# Altium PCB DRF1609H-PCB-PCB50.PcbDoc
Units mm, origin at the board's own origin, x right, y up, seen from the top; angles counter-clockwise.
Board outline 152.4 x 101.6 mm, 2 copper layers (Top Layer, Bottom Layer); 2 components, 0 nets, 18 pads, 0 vias.
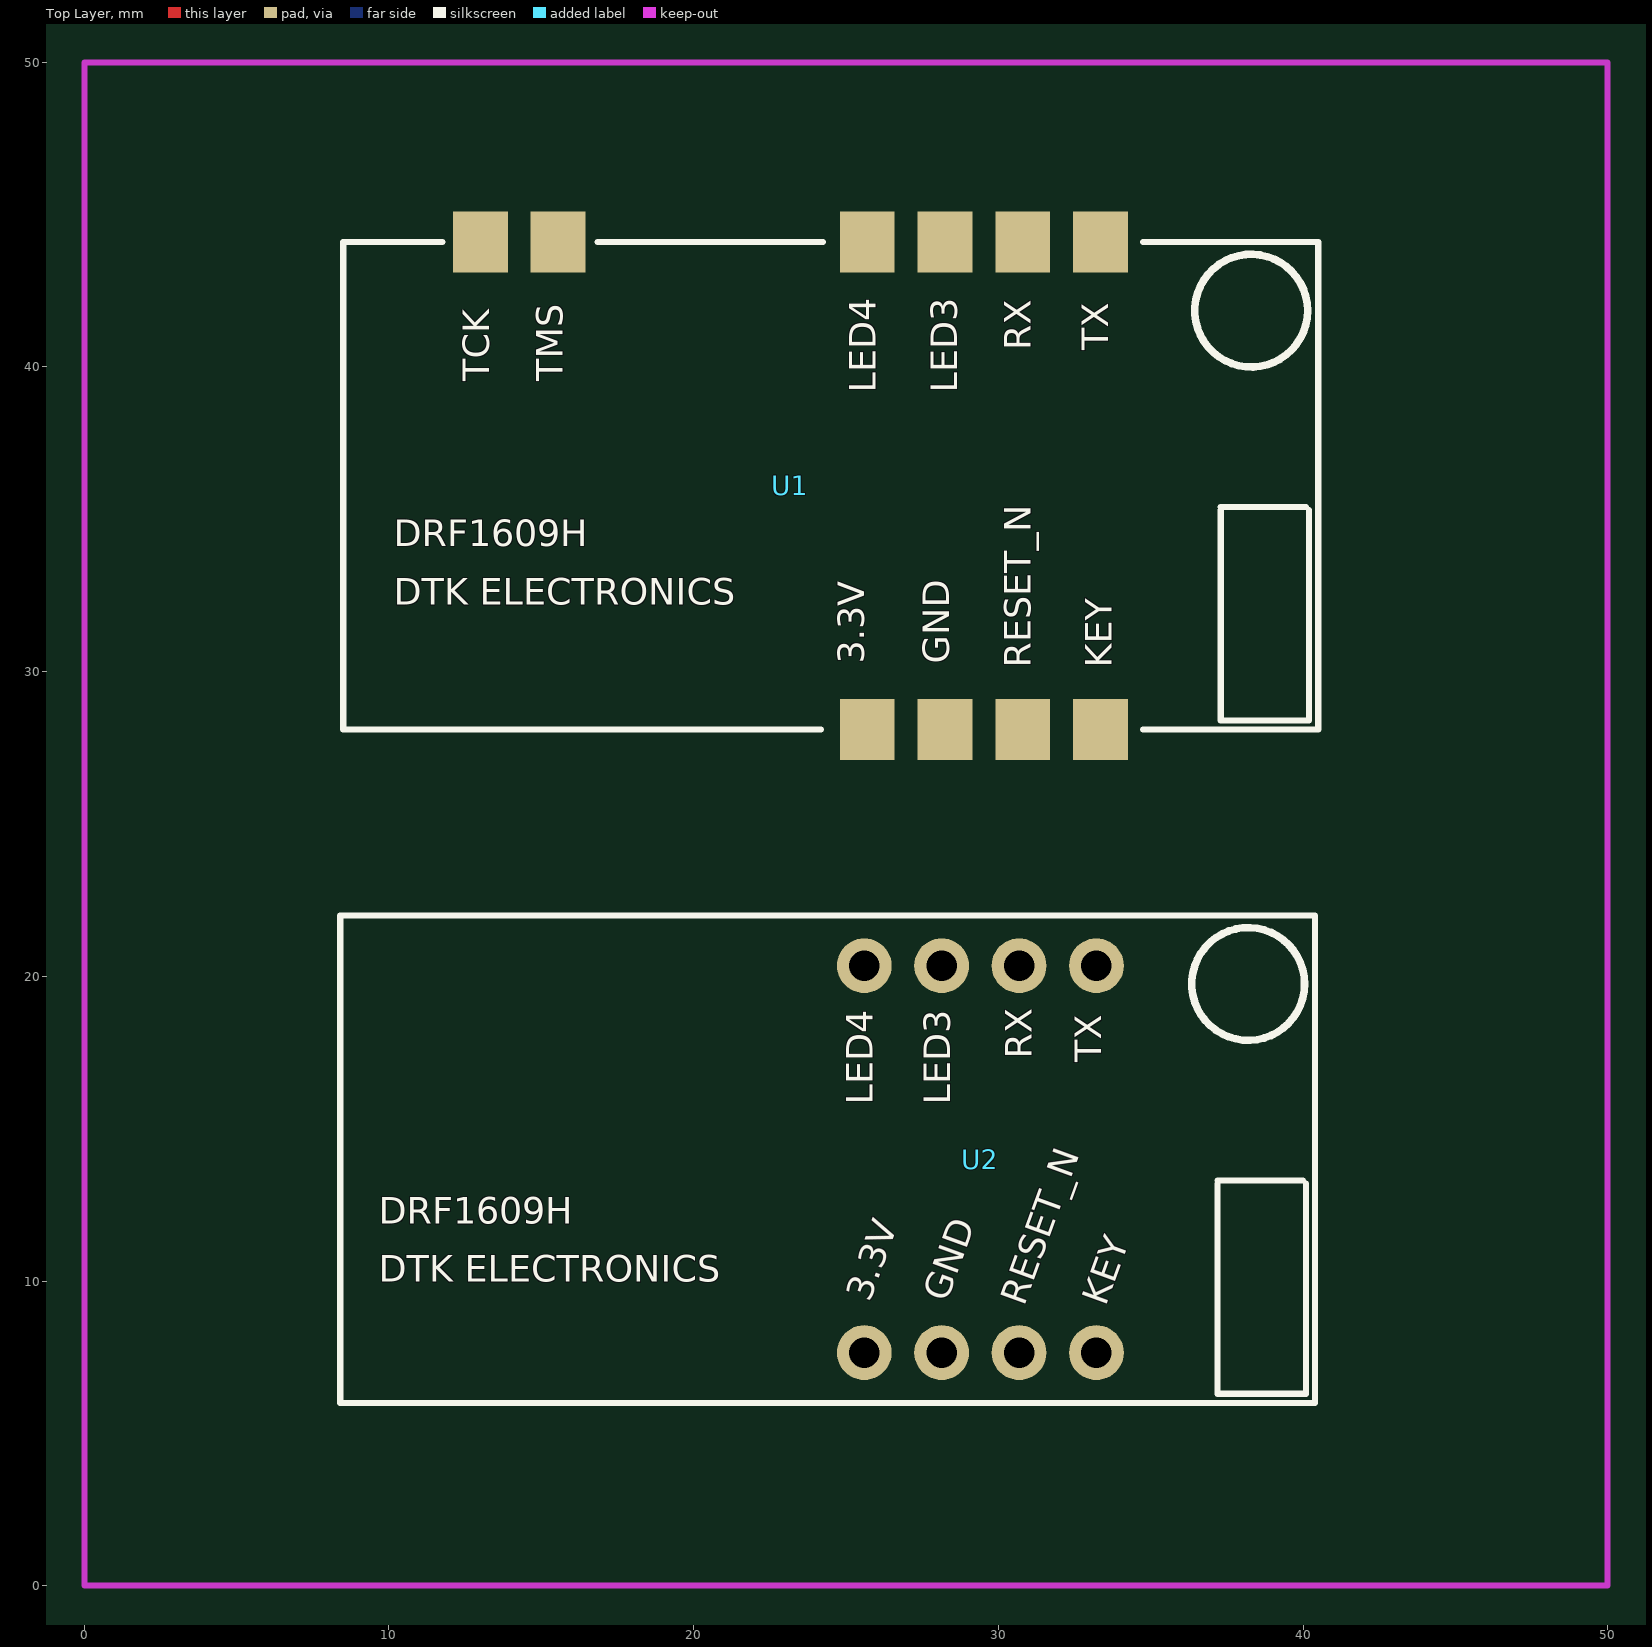
[diagram p0: Top Layer view]
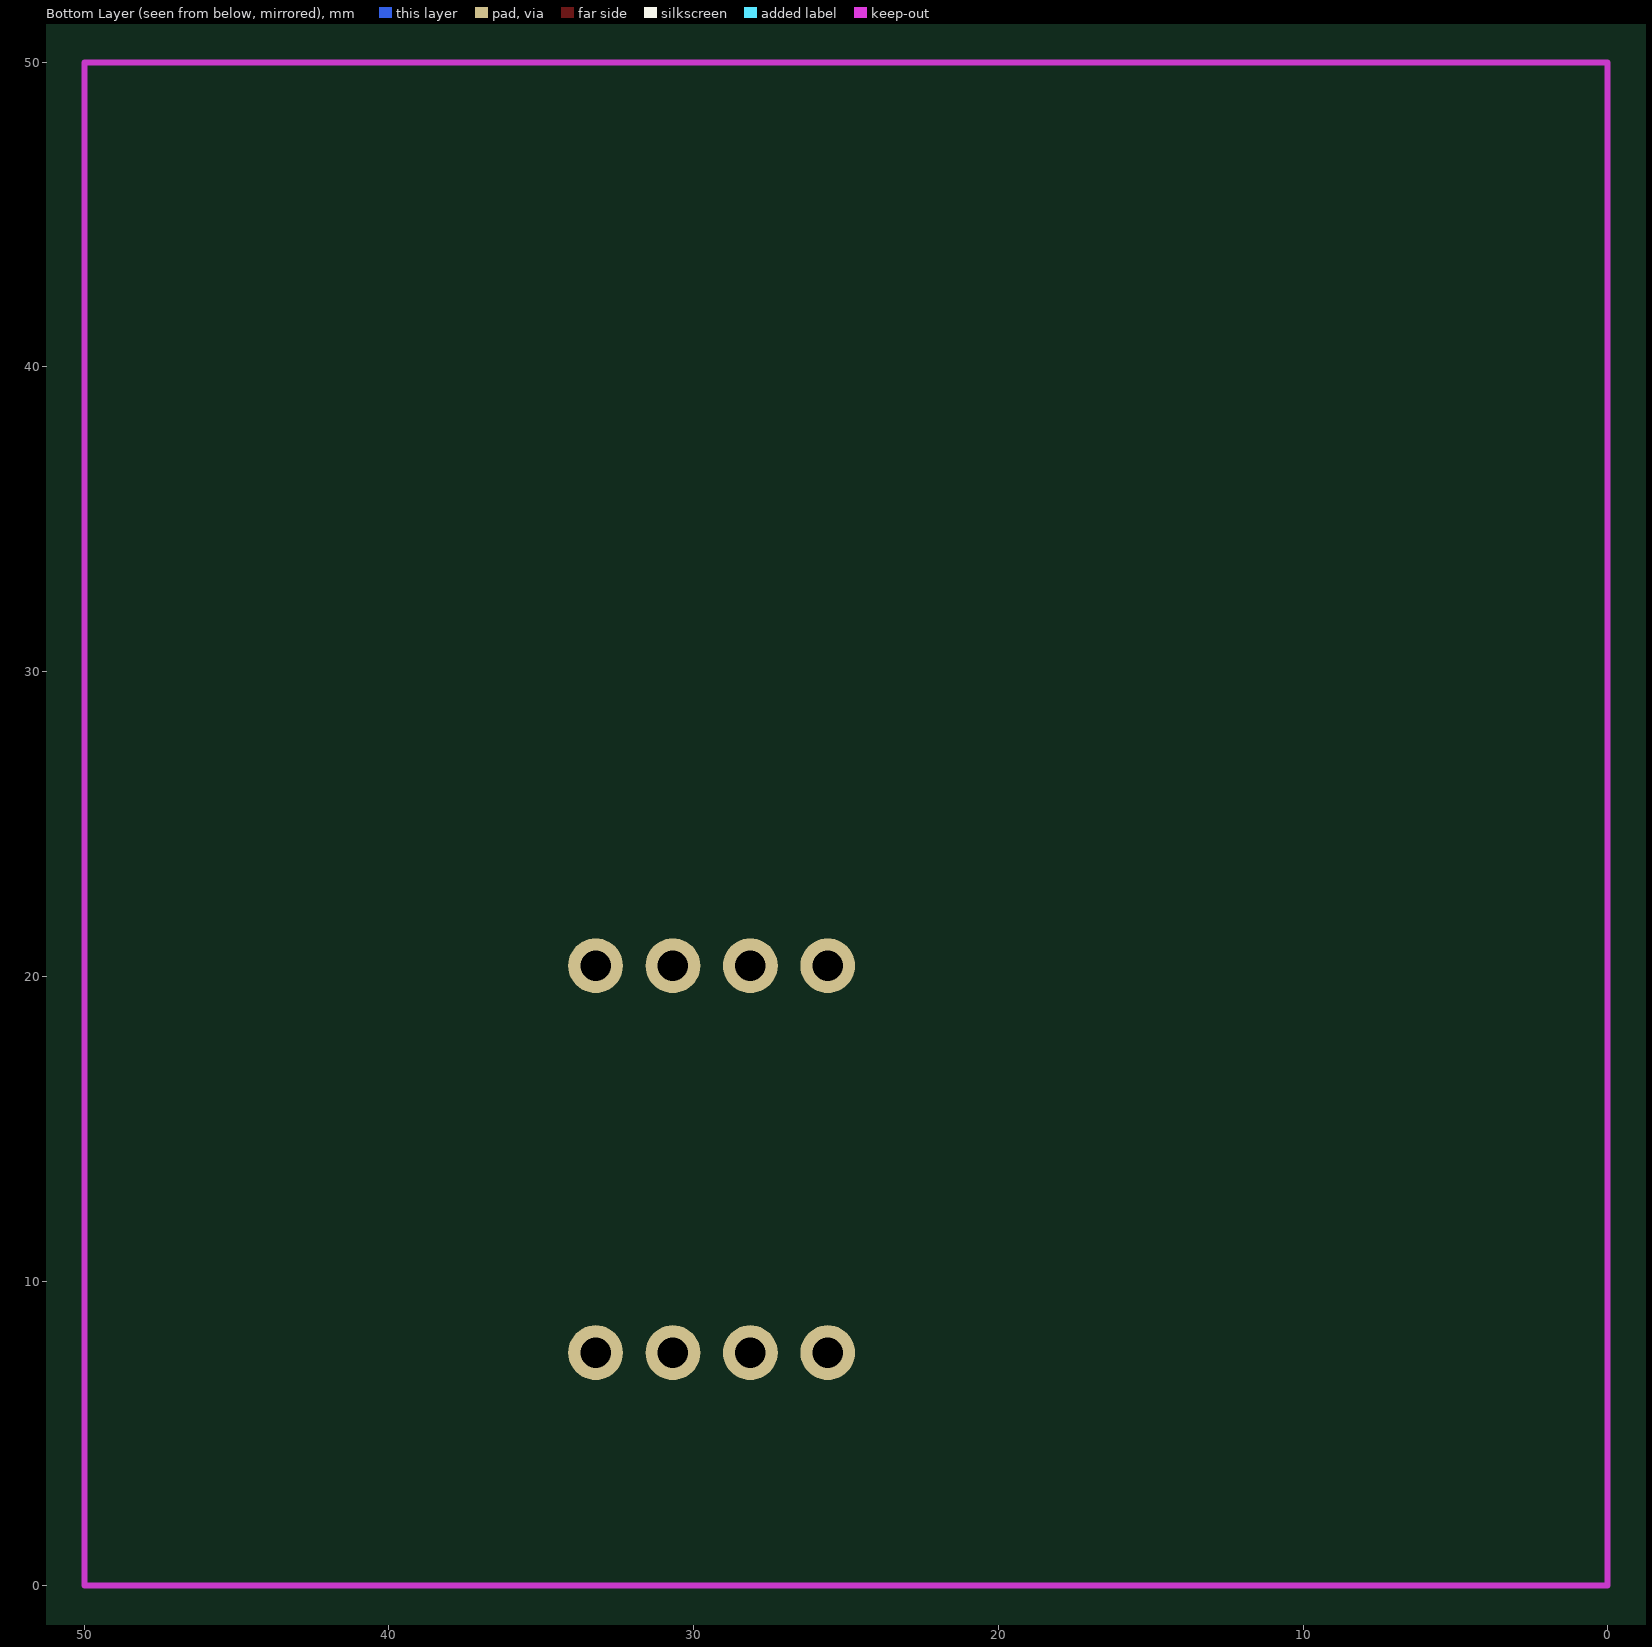
[diagram p1: Bottom Layer view, seen from below]

## Layer stack, top to bottom
Top Layer: signal copper 0.0356
Dielectric: dielectric 0.32, FR-4, Dk 4.8
Bottom Layer: signal copper 0.0356

## Board outline
-48.5,-31.5 103.9,-31.5 103.9,70.1 -48.5,70.1

## Design rules (kind name [scope] priority, off if disabled: settings)
Clearance [All] p1: gap=0.254
PolygonConnect [All] p1: connectstyle=Relief reliefconductorwidth=0.254 reliefentries=4 polygonreliefangle="90 Angle"
RoutingVias [All] p1: holewidth=0.711 width=1.27 viastyle="Through Hole" minholewidth=0.711 minwidth=1.27 maxholewidth=0.711 maxwidth=1.27
SilkscreenOverComponentPads [All] p1: minsilkscreentomaskgap=0.254
SolderMaskExpansion [All] p1: expansion=0.102
Width [All] p1: maxlimit=0.254 minlimit=0.254 preferedwidth=0.254
27 further rules are at their usual default settings.

## Components (designator, comment, footprint, x,y, rotation, side; value= is the part's Value field where it differs from the comment)
U1 "DRF1609H-SMT" DRF1609H-SMT 24.5,36.1 r0 top
U2 "DRF1609H-SMT" DRF1609H-DIP 24.4,14 r0 top

## Footprints (in the part's own frame and the unit in brackets; to place one, negate y for a bottom-side part, rotate by r counter-clockwise, add the part's x,y. Pads: shape width x height; smd on the part's side, far side on the other; paste and mask are expansions set on the pad)
DRF1609H-DIP [mm]
  round 1.8 hole 1: 1(1.2,-6.35) 2(3.74,-6.35) 3(6.28,-6.35) 4(8.82,-6.35) 5(8.82,6.35) 6(6.28,6.35) 7(3.74,6.35) 8(1.2,6.35)
  silkscreen extent -16,-8 16,8
DRF1609H-SMT [mm]
  rect 1.8x2 smd: 1(1.2,-8) 2(3.75,-8) 3(6.3,-8) 4(8.85,-8) 5(8.85,8) 6(6.3,8) 7(3.75,8) 8(1.2,8) 9(-8.95,8) 10(-11.5,8)
  silkscreen extent -16,-8 16,8

## Nets (pads, with @x,y where several pads share a name; then routed paths per layer and width w, separated by ;. In a path a pad name is that pad's centre, name@x,y a point inside that pad or via, vN(x,y) a via of type N, cw(c..) or ccw(c..) an arc to the next point about the centre after c; other vN are vias at no path point)
pads on no net: U1.1 U1.2 U1.3 U1.4 U1.5 U1.6 U1.7 U1.8 U1.9 U1.10 U2.1 U2.2 U2.3 U2.4 U2.5 U2.6 U2.7 U2.8

## Keep-outs
Keep-Out Layer:
  lines w0.2: 0,0 50,0 50,50 0,50 0,0

## Text inside footprints (layer, text, board x,y; h text height)
U1: Top Overlay "DTK ELECTRONICS" at 10.149,31.909 h1.5; Top Overlay "DRF1609H" at 10.149,33.814 h1.5; Top Overlay "3.3V" at 25.897,30.258 h1.5 r90; Top Overlay "GND" at 28.691,30.258 h1.5 r90; Top Overlay "RESET_N" at 31.358,30.131 h1.5 r90; Top Overlay "KEY" at 34.025,30.131 h1.5 r90; Top Overlay "TX" at 33.898,40.545 h1.5 r90; Top Overlay "RX" at 31.358,40.545 h1.5 r90; Top Overlay "LED3" at 28.945,39.148 h1.5 r90; Top Overlay "LED4" at 26.278,39.148 h1.5 r90; Top Overlay "TMS" at 15.991,39.529 h1.5 r90; Top Overlay "TCK" at 13.578,39.529 h1.5 r90
U2: Top Overlay "LED4" at 26.178,15.778 h1.5 r90; Top Overlay "LED3" at 28.718,15.778 h1.5 r90; Top Overlay "RX" at 31.385,17.302 h1.5 r90; Top Overlay "TX" at 33.671,17.175 h1.5 r90; Top Overlay "KEY" at 33.798,9.047 h1.5 r70; Top Overlay "RESET_N" at 31.131,9.047 h1.5 r70; Top Overlay "GND" at 28.591,9.174 h1.5 r70; Top Overlay "3.3V" at 26.051,9.174 h1.5 r70; Top Overlay "DRF1609H" at 9.668,11.587 h1.5; Top Overlay "DTK ELECTRONICS" at 9.668,9.682 h1.5